# Altium PCB PCB_E-button.PcbDoc
Units mil, origin at the board's own origin, x right, y up, seen from the top; angles counter-clockwise.
Board outline 669.29 x 669.29 mil, 2 copper layers (Top Layer, Bottom Layer); 12 components, 8 nets, 38 pads, 39 vias.
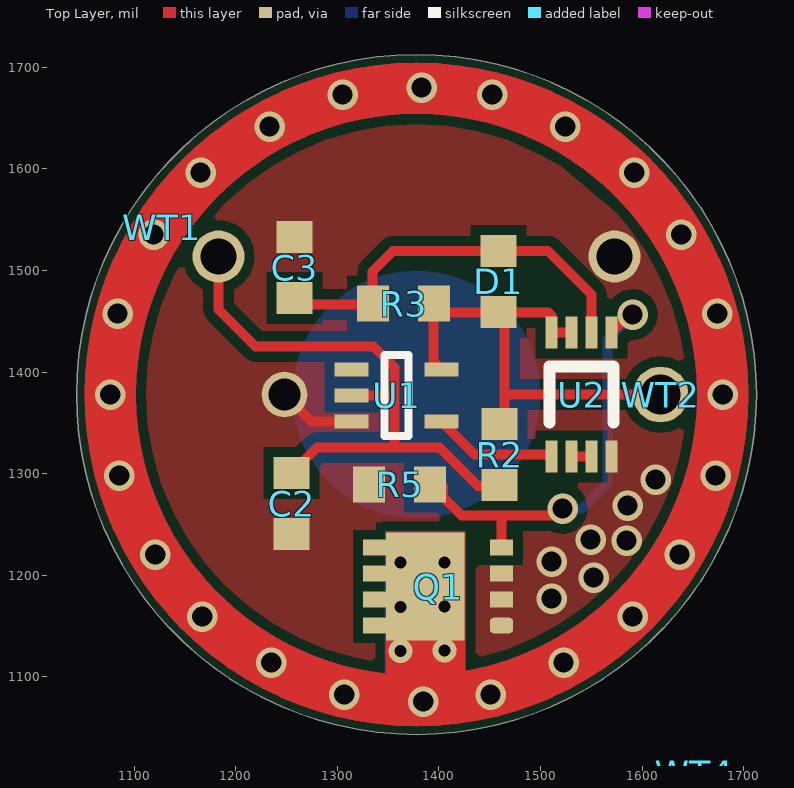
[diagram p0: Top Layer view]
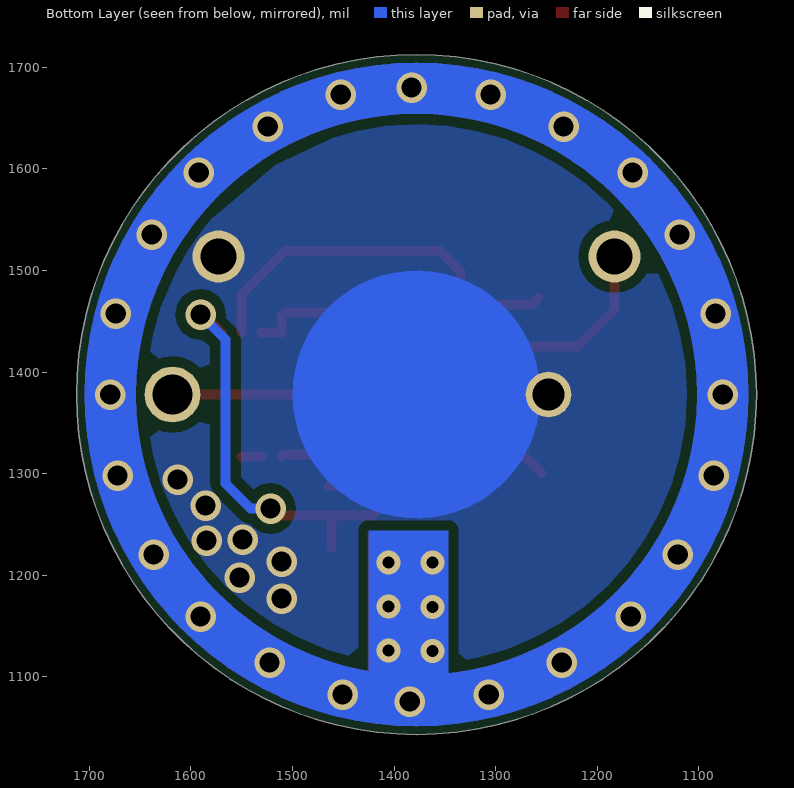
[diagram p1: Bottom Layer view, seen from below]
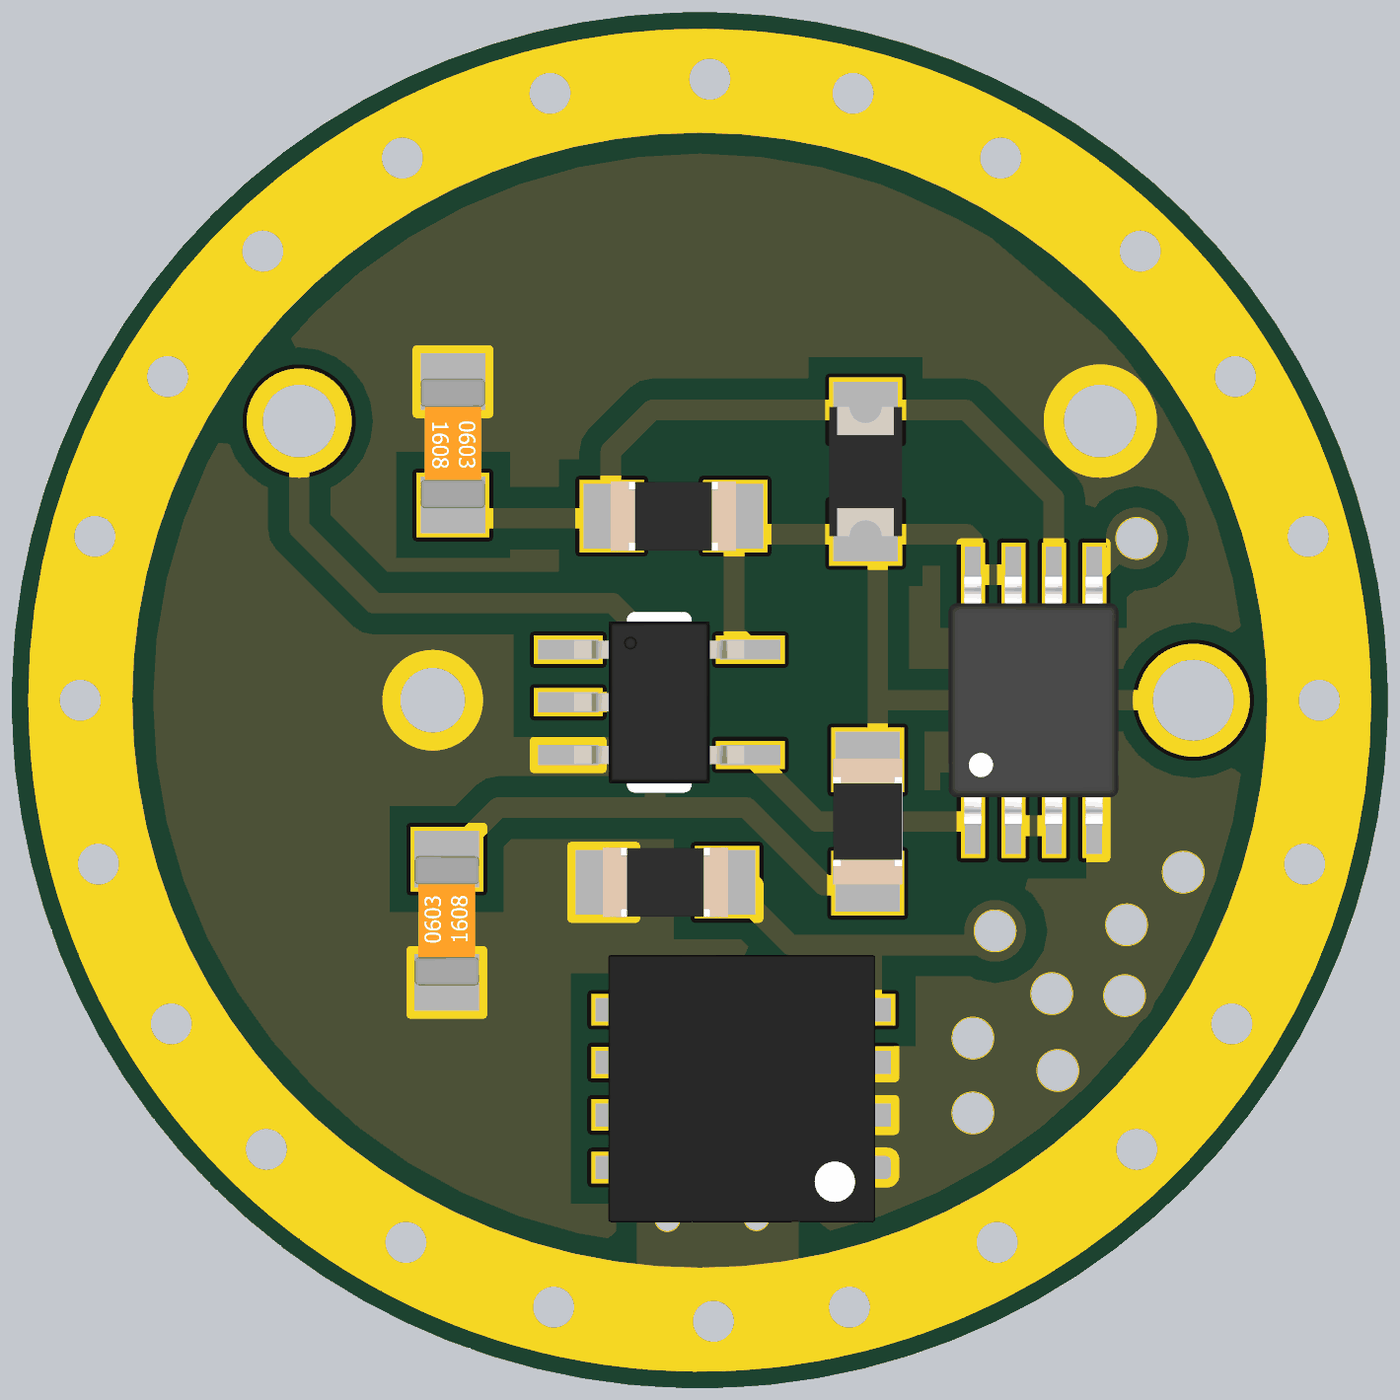
[diagram p2: 3D render of the assembled board from above, using the file's embedded part models]

## Layer stack, top to bottom
Top Solder: solder mask 0.4, Solder Resist, Dk 3.5
Top Layer: signal copper 1.4
Dielectric 1: dielectric 12.6, FR-4, Dk 4.8
Bottom Layer: signal copper 1.4
Bottom Solder: solder mask 0.4, Solder Resist, Dk 3.5

## Board outline
1377.95,1043.31 cw(c1377.95,1377.95) 1043.31,1377.95 cw(c1377.95,1377.95) 1377.95,1712.6 cw(c1377.95,1377.95) 1712.6,1377.95 cw(c1377.95,1377.95)

## Design rules (kind name [scope] priority, off if disabled: settings)
Clearance Clearance_1 [IsRegion] p1: gap=10 ignorepadtopadclearanceinfootprint=FALSE except(0: Arc-Hole Track-Hole SMDPad-Hole THPad-Hole Via-Hole Fill-Hole Poly-Hole Region-Hole Text-Hole; 5: Track-SMDPad Track-Via)
Clearance [All] p2: gap=1 ignorepadtopadclearanceinfootprint=FALSE except(0: Arc-Hole Track-Hole SMDPad-Hole THPad-Hole Via-Hole Fill-Hole Poly-Hole Region-Hole Text-Hole)
ComponentClearance [All] p1: gap=1 collisioncheckmode=3 verticalgap=1 showdistances=FALSE
PasteMaskExpansion [All] p1: expansion=-2
PolygonConnect [All] p1: connectstyle=Direct reliefconductorwidth=10 reliefentries=4 polygonreliefangle="45 Angle" airgapwidth=10
RoutingVias [All] p1: holewidth=28 width=50 viastyle="Through Hole" minholewidth=28 minwidth=50 maxholewidth=28 maxwidth=50
SolderMaskExpansion SolderMaskExpansion_Text [StringText] p1: expansion=4
SolderMaskExpansion [All] p2: expansion=2
Width Width_1 [(InNet('Case') OR InNet('Case') OR InNet('Case') OR InNet('Case'))] p1: maxlimit=10 minlimit=5 preferedwidth=8
Width [All] p2: maxlimit=50 minlimit=2 preferedwidth=10
28 further rules are at their usual default settings.

## Components (designator, comment, footprint, x,y, rotation, side; value= is the part's Value field where it differs from the comment)
C2 "1u0" "Cap 0603" 1254.92,1270.67 r90 top value=1uF
C3 "1u0" "Cap 0603" 1257.87,1502.95 r270 top value=1uF
D1 "B5" 0603 1458.66,1489.17 r90 top value=CD0603-B0230
Q1 "IRLHM620" "PQFN-8 3.3x3.3" 1398.43,1188.98 r90 top value=IRLHM620PbF
R2 "103" "R0603 5%" 1459.65,1318.9 r270 top value=10K
R3 "103" "R0603 5%" 1365.16,1467.52 r180 top value=10K
R5 "104" "R0603 5%" 1361.22,1289.37 r0 top value=M10
U1 "SN74AUP" SC-70-5 1358.27,1376.97 r0 top value=SN74AUP1G17DCKR
U2 "SN74AUP" "VSSOP-8 2.3x2.3mm" 1540.35,1377.95 r90 top value=SN74AUP1G74DCUR
WT1 "*" WT#1 1127.8,1542.13 r90 top value=WT
WT2 "*" WT#2 1590.55,1381.89 r90 top value=WT
WT4 "*" WT#1 1651.57,1004.92 r90 top value=WT

## Footprints (in the part's own frame and the unit in brackets; to place one, negate y for a bottom-side part, rotate by r counter-clockwise, add the part's x,y. Pads: shape width x height; smd on the part's side, far side on the other; paste and mask are expansions set on the pad)
0603 [mm]
  rect 0.8x0.9 smd: 1(-0.762,0) 2(0.762,0)
  body extent -0.8,-0.45 0.8,0.45, height 0.64
"Cap 0603" [mm]
  rect 0.8x0.9 smd: 1(-0.762,0) 2(0.762,0)
  body extent -0.8,-0.4 0.8,0.4, height 0.8
"PQFN-8 3.3x3.3" [mm]
  rrect50% 0.39x0.58 smd: 1(-0.975,-1.605)
  rect 0.39x0.58 smd: 2(-0.325,-1.605) 3(0.325,-1.605) 4(0.975,-1.605) 5(-0.975,1.57) 5(-0.325,1.57) 5(0.325,1.57) 5(0.975,1.57)
  rect 2.7x1.96 smd paste-2: 5(0,0.3)
  body extent -1.65,-1.65 1.65,1.65, height 0.76
"R0603 5%" [mm]
  rect 0.8x0.9 smd: 1(-0.762,0) 2(0.762,0)
  body extent -0.77,-0.43 0.78,0.43, height 0.43
SC-70-5 [mm]
  rect 0.85x0.35 smd: 1(-1.125,0.65) 2(-1.125,0) 3(-1.125,-0.65) 4(1.125,-0.65) 5(1.125,0.65)
  silkscreen extent -0.3,-1.02 0.3,1.02, body extent -1.05,-1 1.05,1, height 0.95
"VSSOP-8 2.3x2.3mm" [mm]
  rect 0.8x0.3 smd: 1(-1.55,0.75) 2(-1.55,0.25) 3(-1.55,-0.25) 4(-1.55,-0.75) 5(1.55,-0.75) 6(1.55,-0.25) 7(1.55,0.25) 8(1.55,0.75)
  silkscreen extent -0.7,-0.8 0.7,0.8, body extent -1.55,-1.05 1.55,1.05, height 0.75
WT#1 [mil]
WT#2 [mil]
  round 55 hole 39.37: 1(-3.94,-27.56)

## Part data
C2 C3: library part CMP-00074-4, "C 1uF  x 25V", Package=0603, Voltage=25V, Component Name="Ceramic Capacitor, SMD, 0603, X7R, 1uF  x 25V 10%", Marking=1u0
D1: library part CMP-00791-1, "CD0603-B0230", Package=0603, ComponentLink1Description=Datasheet, ComponentLink1URL=https://www.mouser.com/ds/2/54/bcd0603_1005-778009.pdf, Component Name="Schottky Barrier Diodes, CD0603-B0230, 0603", Marking=B5, Mounting type=SMD
Q1: library part CMP-00792-2, "IRLHM620PbF", Package="PQFN-8 3x3", ComponentLink1Description=Datasheet, ComponentLink1URL=https://www.infineon.com/dgdl/irlhm620pbf.pdf?fileId=5546d462533600a4015356638be325a3, Component Name="HEXFET Power MOSFET, IRLHM620PbF , PQFN-8 3x3MM", Marking=IRLHM620, Mounting type=SMD
R2 R3: library part CMP-00052-5, "R 10K", Package=0603, Component Name="Fixed resistor, SMD, 0603, 10K 5%", Marking=103
R5: library part CMP-00156-5, "R M10", Package=0603, Component Name="Fixed resistor, SMD, 0603, 100K 5%", Marking=104
U1: library part CMP-00831-1, "SN74AUP1G17DCKR", Package=SC-70-5, ComponentLink1Description=Datasheet, ComponentLink1URL=http://www.ti.com/lit/ds/symlink/sn74aup1g17.pdf, Component Name="IC, Low-Power Single Schmitt-Trigger Buffer, SN74AUP1G17DCKR, SC-70-5", Marking=SN74AUP, Mounting type=SMD
U2: library part CMP-00830-1, "SN74AUP1G74DCUR", Package=VSSOP-8, ComponentLink1Description=Datasheet, ComponentLink1URL=http://www.ti.com/lit/ds/symlink/sn74aup1g74.pdf, Component Name="IC, Low-Power Single Positive-Edge-Triggered D-Type Flip-Flop, SN74AUP1G74DCUR, VSSOP-8", Marking=SN74AUP, Mounting type=SMD
WT1 WT2 WT4: library part CMP-00159-3, "WT", ComponentLink1Description=Datasheet, Component Name="Connector, WT", Package=WT, PartId=1

## Free pads (board coordinates)
  round 45 hole 31.5: 3(1248.03,1377.95)
  round 51.18 hole 35.43: 4(1183.07,1513.78) 4(1572.83,1513.78)

## Via types
v1: diameter 30, hole 20, Top Layer to Bottom Layer, 24 vias
v2: diameter 30, hole 20, Top Layer to Bottom Layer, tented both sides, 9 vias
v3: diameter 23.62, hole 11.81, Top Layer to Bottom Layer, 6 vias

## Nets (pads, with @x,y where several pads share a name; then routed paths per layer and width w, separated by ;. In a path a pad name is that pad's centre, name@x,y a point inside that pad or via, vN(x,y) a via of type N, cw(c..) or ccw(c..) an arc to the next point about the centre after c; other vN are vias at no path point)
Case: Q1.5 | length 7746.8
  Top Layer w7.87: 1055.12,1377.95 ccw(c1377.95,1377.95) 1700.79,1377.95 ; 1055.12,1377.95 cw(c1377.95,1377.95) 1700.79,1377.95 ; 1055.12,1377.95 v1(1076.54,1377.95) 1097.95,1377.95 ; 1097.95,1377.95 ccw(c1377.95,1377.95) 1657.95,1377.95 ; 1097.95,1377.95 cw(c1377.95,1377.95) 1657.95,1377.95 ; 1657.95,1377.95 1700.79,1377.95
  Bottom Layer w7.87: 1055.12,1377.95 ccw(c1377.95,1377.95) 1700.79,1377.95 ; 1055.12,1377.95 cw(c1377.95,1377.95) 1700.79,1377.95 ; 1055.12,1377.95 v1(1076.54,1377.95) 1097.95,1377.95 ; 1097.95,1377.95 ccw(c1377.95,1377.95) 1657.95,1377.95 ; 1097.95,1377.95 cw(c1377.95,1377.95) 1657.95,1377.95 ; 1657.95,1377.95 1700.79,1377.95
  other v1: 1384.61,1075.79 1306.85,1082.68 1450.79,1082.68 1235,1114.17 1522.64,1114.17 1167.09,1159.45 1590.55,1159.45 1120.83,1220.47 1636.81,1220.47 1085.39,1298.23 1672.24,1298.23 1679.37,1377.95 1083.66,1457.68 1673.98,1457.68 1119.09,1535.43 1638.54,1535.43 1165.35,1596.46 1592.28,1596.46 1233.27,1641.73 1524.37,1641.73 1305.12,1673.23 1452.52,1673.23 1382.87,1680.12
  other v3: 1362.2,1125.57 1405.51,1125.98 1362.2,1169.01 1405.51,1169.29 1362.2,1212.46 1405.51,1212.6
CentralPad: C2.1 C3.1 pad.3 pad.4@1572.83,1513.78 Q1.1 Q1.2 Q1.3 R5.1 U1.3 U2.4 | length 819.1
  Top Layer w10: pad.3 1274.61,1351.38 U1.3
  Bottom Layer w7.87: 1496.06,1377.95 ccw(c1377.95,1377.95) 1496.06,1377.95
  other v2: 1510.83,1177.17 1552.17,1197.83 1510.83,1213.58 1584.65,1234.25 1549.21,1235.24 1585.63,1268.7 1613.19,1294.29
NetC2_2: C2.2 pad.4@1183.07,1513.78 R2.2 U1.2 | length 606.7
  Top Layer w10: pad.4@1183.07,1513.78 1183.07,1461.61 1219.49,1425.2 1335.63,1425.2 1356.3,1404.53 1356.3,1375 ; C2.2 1280.04,1325.79 1356.3,1325.79 ; U1.2 1354.33,1376.97 1356.3,1375 ; R2.2@1464.57,1287.91 1438.46,1287.91 1400.59,1325.79 1356.3,1325.79 ; 1356.3,1325.79 1356.3,1375
NetC3_2: C3.2 D1.2 R3.2 U2.6 | length 402.1
  Top Layer w10: C3.2 1264.29,1466.54 1326.8,1466.54 1334.68,1458.66 1334.68,1499.05 1354.8,1519.17 D1.2 1507.4,1519.17 1550.2,1476.38 U2.6
NetU1_4: U1.4 U2.1 | length 122.5
  Top Layer w10: U1.4 1435.04,1318.9 1508.86,1318.9 U2.1
NetU2_2: U2.2 U2.3 | length 19.7
  Top Layer w10: U2.2 U2.3
Q: Q1.4 R5.2 U2.5 | length 431.4
  Top Layer w10: R5.2@1394.68,1297.25 1404.03,1287.89 1404.03,1277.07 1422.24,1258.86 1461.61,1258.86 ; Q1.4 1461.61,1258.86 ; v2@1513.29,1258.86 1461.61,1258.86 ; U2.5 1587.6,1456.69 v2(1590.55,1456.69)
  Bottom Layer w10: v2(1521.65,1265.75) 1541.34,1265.75 1565.94,1290.35 1565.94,1432.09 v2(1590.55,1456.69)
TRIGVCC: D1.1 R2.1 R3.1 U1.5 U2.7 U2.8 WT2.1 | length 480.4
  Top Layer w10: U1.5 1394.68,1410.44 1394.68,1458.66 D1.1@1459.17,1458.66 ; D1.1 D1.1@1459.17,1458.66 ; R2.1@1464.57,1347.91 1464.57,1377.95 ; U2.7 U2.8 1510.83,1455.71 1507.87,1458.66 D1.1@1459.17,1458.66 ; WT2.1 1464.57,1377.95 ; D1.1@1459.17,1458.66 1464.57,1453.27 1464.57,1377.95
pads on no net: U1.1

## Polygon pours and split planes (outlines as drawn)
CentralPad on Top Layer "CENTRALPAD_L01_P002" (solid, remove dead copper, pour order 2): 1185.04,1570.87 1275.59,1633.86 1342.52,1649.61 1427.17,1647.64 1456.69,1633.86 1515.75,1606.3 1566.93,1562.99 1598.87,1535.96 1643.7,1431.1 1643.7,1326.77 1633.86,1291.34 1614.17,1240.16 1566.93,1185.04 1480.32,1125.98 1438.98,1112.2 1377.95,1106.3 1271.65,1125.98 1228.35,1153.54 1177.17,1196.85 1122.05,1275.59 1112.2,1332.68 1106.3,1385.83 1122.05,1468.5 1153.54,1523.62
CentralPad on Bottom Layer "CENTRALPAD_L02_P006" (solid, remove dead copper, pour order 6): 1185.72,1568.91 1276.27,1631.9 1343.2,1647.65 1427.84,1645.68 1457.37,1631.9 1516.42,1604.34 1567.61,1561.04 1599.55,1534.01 1644.38,1429.15 1644.38,1324.82 1634.54,1289.38 1614.85,1238.2 1567.61,1183.08 1480.99,1124.03 1439.65,1110.25 1378.63,1104.34 1272.33,1124.03 1229.02,1151.59 1177.84,1194.89 1122.72,1273.63 1112.88,1330.72 1106.98,1383.87 1122.72,1466.55 1154.22,1521.67

## Other copper
Top Layer:
  rectangle net Case: 1347.44,1087.25 1426.18,1243.11
  region net Case: 1700.73,1377.4 cw(c1377.9,1377.4) 1055.07,1377.4 1094.44,1377.4 ccw(c1376.17,1377.4) 1657.9,1377.4
  region net Case: 1055.12,1377.95 cw(c1377.95,1377.95) 1700.79,1377.95 1661.42,1377.95 ccw(c1379.68,1377.95) 1097.95,1377.95
Bottom Layer:
  rectangle net Case: 1346.46,1070.87 1425.2,1244.09
  region net Case: 1700.79,1377.95 cw(c1377.95,1377.95) 1055.12,1377.95 1097.95,1377.95 ccw(c1377.95,1377.95) 1657.95,1377.95
  region net Case: 1700.79,1377.95 ccw(c1377.95,1377.95) 1055.12,1377.95 1097.95,1377.95 cw(c1377.95,1377.95) 1657.95,1377.95
  region net CentralPad: 1377.95,1259.84 cw(c1377.95,1377.95) 1259.84,1377.95 cw(c1377.95,1377.95) 1377.95,1496.06 cw(c1377.95,1377.95) 1496.06,1377.95 cw(c1377.95,1377.95)

## Silkscreen, mask and mechanical layers (free items; w line width, h text height)
Top Solder:
  region: 1700.79,1377.95 cw(c1377.95,1377.95) 1055.12,1377.95 1097.95,1377.95 ccw(c1377.95,1377.95) 1657.95,1377.95
  region: 1700.79,1377.95 ccw(c1377.95,1377.95) 1055.12,1377.95 1097.95,1377.95 cw(c1377.95,1377.95) 1657.95,1377.95
  lines w7.87: 1055.12,1377.95 cw(c1377.95,1377.95) 1700.79,1377.95 ; 1055.12,1377.95 ccw(c1377.95,1377.95) 1700.79,1377.95 ; 1055.12,1377.95 cw(c1377.95,1377.95) 1700.79,1377.95 ; 1055.12,1377.95 ccw(c1377.95,1377.95) 1700.79,1377.95 ; 1097.95,1377.95 cw(c1377.95,1377.95) 1657.95,1377.95 cw(c1377.95,1377.95) 1097.95,1377.95
Bottom Solder:
  region: 1700.79,1377.95 ccw(c1377.95,1377.95) 1055.12,1377.95 1097.95,1377.95 cw(c1377.95,1377.95) 1657.95,1377.95
  region: 1700.79,1377.95 cw(c1377.95,1377.95) 1055.12,1377.95 1097.95,1377.95 ccw(c1377.95,1377.95) 1657.95,1377.95
  region: 1377.95,1259.84 cw(c1377.95,1377.95) 1259.84,1377.95 cw(c1377.95,1377.95) 1377.95,1496.06 cw(c1377.95,1377.95) 1496.06,1377.95 cw(c1377.95,1377.95)
  lines w7.87: 1055.12,1377.95 ccw(c1377.95,1377.95) 1700.79,1377.95 ; 1055.12,1377.95 cw(c1377.95,1377.95) 1700.79,1377.95 ; 1055.12,1377.95 ccw(c1377.95,1377.95) 1700.79,1377.95 ; 1055.12,1377.95 cw(c1377.95,1377.95) 1700.79,1377.95 ; 1097.95,1377.95 cw(c1377.95,1377.95) 1657.95,1377.95 cw(c1377.95,1377.95) 1097.95,1377.95
  text "FORLED.COM.UA" at 1489.17,1521.65 h20
  text "K" at 1246.06,1463.58 h40
  text "-" at 1530.51,1460.63 h40
  text "+" at 1616.14,1305.12 h40
Board:
  circle w7.87: c1377.95,1377.95 r334.65